# Altium PCB SENSEI_Base-Board.PcbDoc (part 9 of 10)
Units mm, origin at the board's own origin, x right, y up, seen from the top; angles counter-clockwise.
Board outline 51.6 x 28.1 mm, 8 copper layers (Top Sig/Pwr, GND1, Sig1, GND2, Sig2, Pwr, GND3, Bot Sig/Pwr), stack 1.53 mm thick; 209 components, 201 nets, 1031 pads, 2222 vias.
Unrouted connection lines stored in the file: 214.
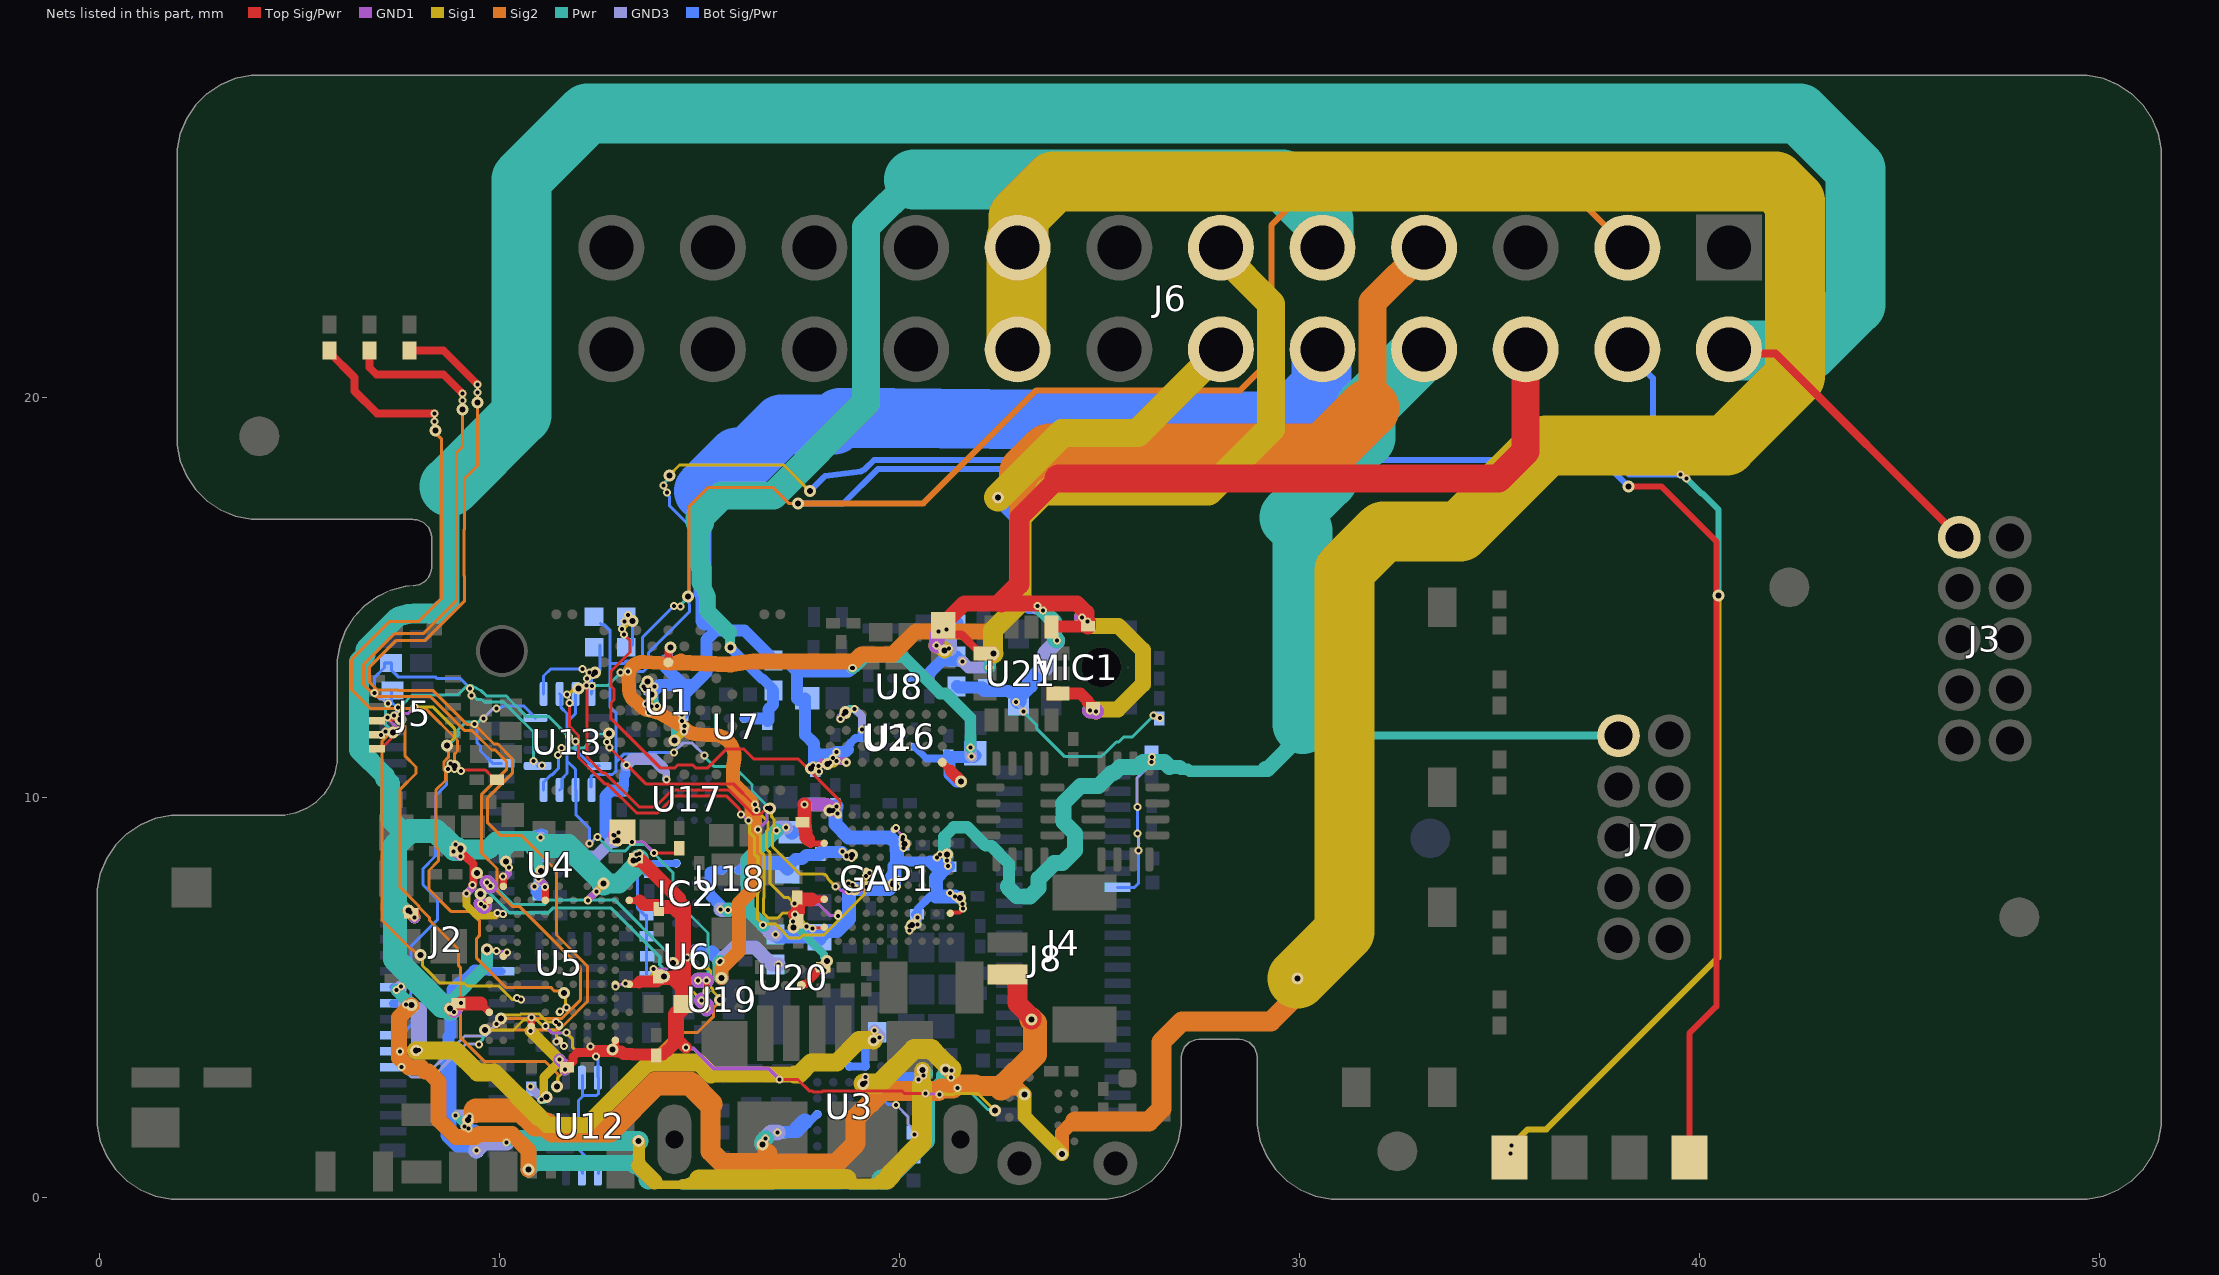
[diagram p14: the nets of this part, all layers, seen from the top]

## Via types
v1: diameter 0.2, hole 0.1, Top Sig/Pwr to GND1, 544 vias
v2: diameter 0.2, hole 0.1, GND3 to Bot Sig/Pwr, 436 vias
v3: diameter 0.2, hole 0.1, GND1 to Sig1, 385 vias
v4: diameter 0.3, hole 0.15, Sig1 to Pwr, 293 vias
v5: diameter 0.3, hole 0.15, Top Sig/Pwr to Bot Sig/Pwr, tented both sides, 284 vias
v6: diameter 0.2, hole 0.1, Pwr to GND3, 280 vias

## Nets (pads, with @x,y where several pads share a name; then routed paths per layer and width w, separated by ;. In a path a pad name is that pad's centre, name@x,y a point inside that pad or via, vN(x,y) a via of type N, cw(c..) or ccw(c..) an arc to the next point about the centre after c; other vN are vias at no path point) (continued)
SPI_B_CLK_GAP: GAP1.D6 J6.4 R14.1 R39.1 U13.8 | length 72.4
  Top Sig/Pwr w0.075: v1(11.758,12.353) 11.758,11.769 11.98,11.547 11.98,10.997 12.639,10.338 12.701,10.338 13.434,9.605 13.961,9.605 14.394,10.037 15.585,10.037 15.674,10.037 15.986,9.725 15.986,9.719 16.017,9.687 16.017,9.599 v1(16.041,9.575) ; GAP1.D6@19.175,8.15 19.217,8.15 v1(19.261,8.106)
  Top Sig/Pwr w0.15: R39.1@35.25,1 35.25,1.075 v1(35.275,1.1)
  GND1 w0.075: v3(11.697,12.567) 11.697,12.534 11.734,12.496 11.734,12.377 v1(11.758,12.353) ; v1(16.041,9.575) 16.056,9.575 16.213,9.418 v3(16.229,9.418) ; v3(19.164,8.031) 19.175,8.031 19.25,8.106 v1(19.261,8.106)
  GND1 w0.15: v1(35.275,1.1) 35.275,1.264 v3(35.308,1.297)
  GND3 w0.075: v6(12.176,12.797) 12.185,12.788 12.311,12.788 v2(12.32,12.778) ; v6(13.03,13.117) 13.046,13.132 13.205,13.132 v2(13.22,13.147) ; v6(14.1,17.8) 14.124,17.776 14.124,17.718 14.188,17.654 v2(14.188,17.62)
  GND3 w0.15: v2(39.525,18.075) 39.539,18.075 39.629,17.985 39.665,17.985 v6(39.675,17.975)
  Sig1 w0.075: v3(11.697,12.567) 11.725,12.567 11.834,12.676 11.941,12.676 v4(11.984,12.719) ; v4(14.25,18.05) 14.507,18.307 17.109,18.307 v5(17.764,17.651) ; v3(16.229,9.418) 16.253,9.394 16.253,9.172 16.261,9.164 16.261,9.108 16.382,8.987 16.382,8.579 16.472,8.489 16.472,7.601 16.46,7.589 16.46,6.942 16.573,6.829 16.914,6.829 17.124,6.619 17.124,6.605 17.245,6.484 17.512,6.484 17.587,6.56 18.113,6.56 19.129,7.575 19.146,7.615 v3(19.164,8.031)
  Sig1 w0.15: v3(35.308,1.297) 35.711,1.7 36.175,1.7 40.475,6 v4(40.475,15.05)
  Pwr w0.075: v4(11.984,12.719) 12.045,12.719 12.099,12.773 12.152,12.773 v6(12.176,12.797) 12.71,12.797 v6(13.03,13.117) ; v6(14.1,17.8) 14.1,17.834 14.207,17.941 14.207,18.007 v4(14.25,18.05)
  Pwr w0.15: v6(39.675,17.975) 40.054,17.596 40.077,17.596 40.475,17.199 v4(40.475,15.05)
  Bot Sig/Pwr w0.075: U13.8@12.305,12.584 U13.8@12.305,12.655 ; v2(12.32,12.778) 12.32,12.765 U13.8@12.305,12.75 ; U13.8@12.324,12.655 12.324,12.731 U13.8@12.305,12.75 ; R14.1@12.524,13.81 12.524,13.183 12.305,12.964 U13.8@12.305,12.75 ; v2(13.22,13.147) 13.605,13.147 13.729,13.271 13.729,13.613 14.728,14.612 14.75,14.634 14.75,14.696 14.744,14.949 14.744,14.971 14.737,14.977 14.737,16.805 14.25,17.293 14.25,17.524 14.188,17.586 v2(14.188,17.62) v2@14.188,17.627
  Bot Sig/Pwr w0.15: v5(17.764,17.651) 18.098,17.985 18.142,18.029 19.043,18.148 19.14,18.202 19.369,18.431 37.888,18.431 38.243,18.075 38.841,18.075 ; J6.4@38.2,21.2 38.2,21.121 38.841,20.48 38.841,18.075 ; v2(39.525,18.075) 38.841,18.075
SPI_B_CS: J2.24 J5.7 U5.F3 U13.4 | length 17
  Top Sig/Pwr w0.075: J5.7@6.818,11.936 7.368,11.936 7.499,12.067 v1(7.533,12.067) ; U5.F3@11.5,4.625 11.504,4.629 11.504,4.632 v1(11.516,4.643)
  GND1 w0.075: v1(7.533,12.067) 7.557,12.091 7.716,12.091 v3(7.886,12.261) ; v1(11.516,4.643) 11.542,4.643 11.649,4.75 v3(11.675,4.75)
  Sig2 w0.075: v4(8.692,11.297) 8.725,11.264 8.725,11 8.622,10.897 8.622,10.679 8.656,10.645 8.656,10.422 8.42,10.186 8.42,8.756 8.476,8.7 8.476,8.407 8.24,8.171 8.24,7.703 8.801,7.142 9.277,7.142 9.502,6.917 9.502,6.537 9.434,6.469 9.434,5.977 10.163,5.249 11.286,5.249 11.383,5.153 11.578,5.153 v4(11.622,5.11)
  GND3 w0.075: v2(9.375,11.832) 9.399,11.856 9.452,11.856 9.564,11.967 v6@9.603,11.967 ; v6(9.603,11.973) 9.831,12.201 9.902,12.201 v2(9.926,12.225)
  Sig1 w0.075: v3(7.886,12.261) 8.339,12.261 8.875,11.725 8.875,11.715 8.89,11.7 8.89,11.506 8.692,11.308 v4(8.692,11.297) ; v4(11.622,5.11) 11.622,5.06 11.651,5.03 11.651,4.774 v3(11.675,4.75)
  Pwr w0.075: v4(8.692,11.297) 8.722,11.297 8.964,11.539 8.964,11.681 9.159,11.876 9.472,11.876 9.569,11.973 v6(9.603,11.973)
  Bot Sig/Pwr w0.075: v2(9.375,11.832) 9.375,11.798 9.437,11.736 9.437,11.373 9.529,11.282 9.529,11.156 9.835,10.85 J2.24@10.055,10.85 ; v2(9.926,12.225) 9.949,12.249 10.061,12.249 10.099,12.288 10.603,12.288 U13.4@10.902,11.988
SPI_B_CS_GAP: GAP1.A2 U13.5 | length 14.4
  Top Sig/Pwr w0.075: v1(12.19,12.972) 12.19,10.998 12.575,10.613 12.637,10.613 13.496,9.755 13.899,9.755 14.332,10.187 15.647,10.187 15.736,10.187 16.136,9.787 16.136,9.781 16.337,9.58 16.539,9.58 v1(16.696,9.737) ; v1(17.831,6.725) 17.844,6.738 18.113,6.738 GAP1.A2@18.125,6.75
  GND1 w0.075: v1(12.19,12.972) 12.214,12.996 12.214,13.056 12.25,13.092 v3(12.25,13.126) ; v3(16.473,9.196) 16.696,9.42 v1(16.696,9.737) ; v3(17.682,6.772) 17.706,6.749 17.808,6.749 v1(17.831,6.725)
  GND3 w0.075: v2(12.082,13.208) 12.116,13.208 12.248,13.076 12.325,13.076 v6(12.349,13.052)
  Sig1 w0.075: v3(12.25,13.126) v4(12.391,13.126) ; v3(16.473,9.196) 16.497,9.172 16.497,9.084 16.532,9.049 16.532,8.641 16.622,8.551 16.622,7.491 16.61,7.479 16.61,7.092 16.723,6.979 16.959,6.979 17.093,7.113 17.421,7.113 17.537,6.996 17.537,6.966 17.55,6.954 17.55,6.939 17.682,6.806 v3(17.682,6.772)
  Pwr w0.075: v6(12.349,13.052) 12.391,13.095 v4(12.391,13.126)
  Bot Sig/Pwr w0.075: U13.5@11.105,12.584 11.105,13.03 11.283,13.208 v2(12.082,13.208)
SPI_B_MISO: J5.11 R48.2 U5.E2 U13.12 | length 23.3
  Top Sig/Pwr w0.075: J5.11@6.818,11.236 7.07,11.236 7.289,11.455 7.289,11.503 7.457,11.671 v1(7.475,11.671) ; v1(11.152,4.276) v1(11.152,4.276)
  GND1 w0.075: v3(7.205,11.998) 7.205,11.97 7.475,11.7 v1(7.475,11.671) ; v1(11.152,4.276) 11.326,4.102 11.663,4.102 v3(11.675,4.114)
  Sig2 w0.075: v4(7.525,11.95) 7.525,11.889 7.647,11.767 7.647,11.201 7.648,11.2 7.648,11.027 7.917,10.758 7.917,10.597 7.523,10.203 7.523,7.748 7.988,7.284 7.988,7.256 8.254,6.99 8.254,6.926 8.984,6.195 8.984,5.791 9.026,5.749 9.026,3.998 9.624,3.4 11.145,3.4 11.473,3.072 11.473,2.8 v4(11.445,2.772)
  GND3 w0.075: v6(7.364,12.05) 7.364,12.084 7.444,12.164 7.444,12.221 v2(7.468,12.245) ; v6(11.739,11.517) 11.762,11.517 11.884,11.394 v2(11.907,11.394)
  Sig1 w0.075: v3(7.205,11.998) 7.228,11.974 7.501,11.974 v4(7.525,11.95) ; v4(11.445,2.772) 11.453,2.78 11.453,2.985 11.901,3.432 11.901,3.684 11.826,3.759 11.826,3.963 v3(11.675,4.114)
  Pwr w0.075: v6(7.364,12.05) 7.395,12.05 7.495,11.95 v4(7.525,11.95) 7.577,12.002 7.577,12.316 7.817,12.557 8.964,12.557 9.207,12.8 9.31,12.8 ccw(c10.048,13.825) 9.548,12.665 9.678,12.536 10.165,12.536 10.294,12.407 10.685,12.015 11.24,12.015 v6(11.739,11.517)
  Bot Sig/Pwr w0.075: R48.2@7.308,12.674 7.308,12.379 7.441,12.245 v2(7.468,12.245) ; v2(11.907,11.394) 11.893,11.38 11.893,11.201 12.31,10.784 U13.12@12.51,10.784
SPI_B_MISO_GAP: GAP1.D5 J6.3 R15.1 R41.1 U13.13 | length 88
  Top Sig/Pwr w0.15: v5(38.225,17.775) 39.05,17.775 40.425,16.4 40.425,4.775 39.75,4.1 R41.1@39.75,1
  GND1 w0.075: v3(18.4,7.774) 18.434,7.774 18.534,7.673 18.574,7.673 18.652,7.595 18.94,7.595 v1(19.179,7.756)
  Sig2 w0.075: v4(14.717,15.025) 14.738,15.046 14.738,17.263 15.225,17.75 16.835,17.75 17.235,17.35 v5(17.463,17.35)
  Sig2 w0.15: v5(17.463,17.35) 20.6,17.35 23.425,20.175 28.525,20.175 29.3,20.95 29.3,24.3 30.05,25.05 36.89,25.05 J6.3@38.2,23.74
  GND3 w0.075: v2(14.363,14.784) 14.367,14.78 14.52,14.78 v6(14.525,14.775) ; v2(14.37,11.117) 14.37,11.137 14.586,11.352 14.824,11.352 v6(15.134,11.042)
  Sig1 w0.075: v4(16.766,9.714) 16.809,9.671 16.809,9.512 16.863,9.459 16.863,9.125 16.832,9.094 16.832,8.765 17.52,8.077 18.108,8.077 cw(c18.108,8.002) 18.171,8.043 18.226,7.958 ccw(c18.446,8.101) 18.259,7.917 v3(18.4,7.774)
  Pwr w0.075: v6(14.525,14.775) 14.525,14.804 14.717,14.996 v4(14.717,15.025) ; v6(15.134,11.042) 15.134,11.008 15.222,10.92 ; 15.222,10.919 15.376,10.766 15.565,10.766 15.568,10.769 15.863,10.769 16.315,10.317 16.315,10.166 v4(16.766,9.714)
  Bot Sig/Pwr w0.075: U13.13@12.298,10.256 12.298,10.525 12.346,10.572 12.827,10.572 12.923,10.667 12.923,10.884 ; R15.1@12.532,14.347 12.564,14.315 12.623,14.315 12.773,14.165 12.773,13.343 ; v2(14.363,14.784) 13.579,14.001 13.579,13.523 13.458,13.402 13.175,13.402 13.116,13.343 12.773,13.343 ; v2@14.367,11.128 14.357,11.117 13.746,11.117 13.716,11.087 13.126,11.087 12.923,10.884 ; 12.773,13.343 12.773,12.252 12.923,12.102 12.923,10.884
  Bot Sig/Pwr w0.15: v5(17.463,17.35) 18.606,17.35 19.462,18.206 37.794,18.206 v5(38.225,17.775)
SPI_B_MOSI: J5.9 R47.1 U5.C4 U13.1 | length 17.6
  Top Sig/Pwr w0.075: v1(10.441,4.979) 10.446,4.975 U5.C4@10.45,4.975
  GND1 w0.075: v1(7.044,11.555) 7.05,11.555 7.145,11.65 v3(7.151,11.65) ; v1(10.441,4.979) 10.51,4.979 v3(10.543,4.946)
  Sig2 w0.075: v4(7.338,11.625) 7.289,11.625 7.14,11.476 7.136,11.476 7.065,11.404 7.065,6.925 7.804,6.186 7.844,6.186 7.975,6.054 v4(8.036,6.054)
  GND3 w0.075: v2(6.875,12.606) 6.875,12.6 7.022,12.453 7.078,12.453 7.18,12.35 v6(7.214,12.35) ; v2(9.273,12.722) 9.291,12.704 9.291,12.566 v6(9.309,12.548) ; v6(10.854,10.907) 10.878,10.883 10.944,10.883 11.033,10.794 v2(11.067,10.794)
  Sig1 w0.075: v3(7.151,11.65) 7.164,11.638 7.325,11.638 v4(7.338,11.625) ; v4(8.036,6.054) 8.079,6.011 8.079,5.792 8.234,5.638 ; 8.235,5.638 8.52,5.352 9.028,5.352 9.034,5.346 9.127,5.346 9.194,5.28 9.989,5.28 10.322,4.946 v3(10.543,4.946)
  Pwr w0.075: v6(7.214,12.35) 7.214,12.317 7.152,12.254 7.152,11.823 7.338,11.637 v4(7.338,11.625) ; v6(9.309,12.548) 9.343,12.548 9.448,12.443 9.558,12.443 9.615,12.386 10.103,12.386 10.324,12.164 10.854,11.635 v6(10.854,10.907)
  Bot Sig/Pwr w0.075: v2(6.875,12.606) 6.875,12.991 7.128,13.244 7.128,13.359 R47.1@7.293,13.359 ; R47.1@7.308,13.359 7.308,13.175 7.471,13.011 8.397,13.011 8.44,12.968 9.027,12.968 v2(9.273,12.722) ; U13.1@10.96,10.784 11.058,10.784 v2(11.067,10.794)
SPI_B_MOSI_GAP: GAP1.B3 U13.16 | length 11.4
  Top Sig/Pwr w0.075: v1(12.754,11.246) 13.663,10.337 15.709,10.337 15.851,10.337 16.367,9.822 v1(16.396,9.822)
  GND1 w0.075: v3(12.69,11.388) 12.714,11.364 12.714,11.32 12.754,11.28 v1(12.754,11.246) ; v1(16.396,9.822) 16.411,9.806 16.411,9.702 v3(16.426,9.687) ; v3(17.376,7.346) 17.393,7.329 17.53,7.329 17.541,7.318 17.99,7.318 18.258,7.05 18.456,7.05 v1(18.471,7.036)
  GND3 w0.075: v2(11.468,11.063) 11.492,11.087 11.492,11.138 11.558,11.204 v6(11.558,11.238)
  Sig1 w0.075: v3(12.69,11.388) 12.714,11.412 12.714,11.541 v4@12.771,11.598 ; v3(16.426,9.687) 16.426,9.683 16.713,9.397 16.713,9.187 16.682,9.156 16.682,8.703 16.772,8.613 16.772,7.845 17.122,7.495 17.225,7.495 17.374,7.346 v3(17.376,7.346)
  Pwr w0.075: v6(11.558,11.238) 12.126,11.238 12.465,11.577 12.719,11.577 v4(12.74,11.598)
  Bot Sig/Pwr w0.075: U13.16@11.11,10.184 11.11,10.384 11.279,10.553 11.309,10.553 11.476,10.721 v2@11.476,11.064
SPI_GAP_SEL: U5.K5 U12.6 U12.7 U12.14 U12.15 U13.6 U13.7 U13.14 U13.15 | length 24.9
  Top Sig/Pwr w0.075: v1(12.9,5.275) U5.K5@12.9,5.325
  GND1 w0.075: v1(12.9,5.275) 12.924,5.299 12.987,5.299 13.01,5.322 13.127,5.322 v3(13.151,5.346) ; v3(13.852,5.707) 14.187,5.707 14.469,5.989 v3(14.688,5.989)
  Sig2 w0.075: v4@12.8,3.7 v4(12.825,3.7) 13.016,3.509 13.692,3.509 13.796,3.509 14.409,4.123 14.956,4.123 15.358,4.525 15.358,4.745 15.52,4.906 v4(15.52,4.93)
  GND3 w0.075: v2(12.25,8.849) 12.274,8.849 12.43,9.006 v6(12.454,9.006) ; v6(12.275,3.772) 12.299,3.748 12.299,3.676 12.421,3.555 v2(12.421,3.521)
  Sig1 w0.075: v3(13.151,5.346) 13.169,5.328 13.584,5.328 13.832,5.576 13.832,5.687 v3(13.852,5.707) ; v3(14.688,5.989) 14.962,5.715 15.233,5.715 15.277,5.671 15.277,5.262 15.34,5.199 15.34,5.146 15.52,4.967 v4(15.52,4.93)
  Pwr w0.075: v6(12.275,3.772) 12.693,3.772 12.764,3.7 v4(12.825,3.7) ; v6(12.454,9.006) 12.806,8.653 13.14,8.653 13.306,8.819 13.64,8.819 14.343,8.116 14.343,7.478 15.216,6.606 15.216,5.324 15.34,5.199 15.34,5.146 15.52,4.967 v4(15.52,4.93)
  Bot Sig/Pwr w0.075: U13.15@11.51,10.184 11.565,10.239 11.565,10.462 11.695,10.592 11.695,10.908 ; U13.6@11.51,12.584 11.547,12.547 11.547,12.242 11.695,12.094 11.695,11.879 ; U13.14@11.905,10.184 11.905,10.698 11.695,10.908 ; U13.7@11.905,12.584 11.905,12.089 11.695,11.879 ; U13.14@11.91,10.184 11.912,10.182 11.912,9.572 12.25,9.234 v2(12.25,8.849) ; U12.15@12.005,0.717 U12.15@12.075,0.647 ; U12.15@12.075,0.6 12.075,1.105 ; 12.08,2.519 U12.6@12.08,3.045 ; 12.282,2.544 12.431,2.544 12.475,2.587 U12.7@12.475,3 ; 12.281,2.544 12.105,2.544 11.981,2.42 11.981,1.199 12.075,1.105 ; v2(12.421,3.521) 12.421,3.487 12.467,3.441 U12.7@12.467,2.989 ; U12.14@12.475,0.6 12.475,0.774 12.405,0.844 12.332,0.844 12.2,0.976 12.2,0.979 12.075,1.105 ; 11.695,10.908 11.695,11.879
SWDCLK: J2.45 R49.2 U5.F2 | length 30.6
  Top Sig/Pwr w0.075: v1(11.492,4.319) 11.492,4.283 U5.F2@11.5,4.275
  Top Sig/Pwr w0.2: R49.2@6.75,21.175 6.75,20.75 6.925,20.575 8.6,20.575 v1(9.075,20.1)
  GND1 w0.075: v3(9.075,19.925) v1(9.075,20.1) ; v3(11.415,4.387) 11.425,4.387 v1(11.492,4.319)
  Sig2 w0.075: v4(9.075,19.7) 9.075,18.755 8.925,18.605 8.925,14.912 8.113,14.1 7.388,14.1 6.6,13.312 6.6,12.824 6.899,12.525 8.274,12.525 9.124,11.675 9.313,11.675 9.807,11.181 9.897,11.181 10.174,10.903 10.174,10.686 9.55,10.062 9.55,8.612 9.94,8.222 9.94,7.66 10.325,7.275 10.497,7.275 12.034,5.738 12.034,4.939 11.564,4.469 v4(10.037,4.469)
  GND3 w0.075: v2(7.515,3.648) 7.515,3.614 7.973,3.156 8.274,3.156 8.691,3.573 8.691,3.584 9.145,4.037 9.641,4.037 9.663,4.037 9.787,4.162 9.787,4.184 v6(9.932,4.328)
  Sig1 w0.075: v4(9.075,19.7) v3(9.075,19.925) ; v4(10.037,4.469) 10.126,4.558 10.519,4.558 10.545,4.584 10.997,4.584 11.194,4.387 v3(11.415,4.387)
  Pwr w0.075: v6(9.932,4.328) 9.932,4.346 10.037,4.451 v4(10.037,4.469)
SWDIO: J2.46 R4.2 U5.F1 | length 31.5
  Top Sig/Pwr w0.075: v1(11.425,3.889) 11.464,3.889 U5.F1@11.5,3.925
  Top Sig/Pwr w0.2: R4.2@7.75,21.175 8.6,21.175 v1(9.45,20.325)
  GND1 w0.075: v3(9.45,20.125) v1(9.45,20.325) ; v1@11.425,3.875 11.435,3.865 11.503,3.865 11.58,3.789 v3(11.614,3.789)
  Sig2 w0.075: v4(9.454,19.871) 9.454,18.288 9.125,17.959 9.125,16.698 9.12,16.693 9.12,15.532 9.125,15.527 9.125,14.9 8.15,13.925 7.425,13.925 6.75,13.25 6.75,12.886 6.958,12.679 7.471,12.679 7.475,12.675 8.336,12.675 9.186,11.825 9.375,11.825 9.869,11.331 9.959,11.331 10.324,10.966 10.324,10.599 9.7,9.975 9.7,9.375 10.025,9.05 10.55,9.05 11.427,8.173 11.427,6.557 12.2,5.784 12.2,4.893 11.492,4.185 v4(9.64,4.185)
  GND3 w0.075: v2(7.555,3.254) 7.802,3.006 8.336,3.006 8.962,3.632 8.962,3.634 9.155,3.827 9.487,3.827 v6(9.489,3.825)
  Sig1 w0.075: v3(9.45,20.125) 9.452,20.123 9.452,19.873 v4(9.454,19.871) ; v4(9.64,4.185) 10.358,4.185 10.607,4.434 10.935,4.434 11.185,4.183 11.333,4.183 11.428,4.089 11.428,3.974 v3(11.614,3.789)
  Pwr w0.075: v6(9.489,3.825) 9.489,3.859 9.597,3.967 9.597,4.142 v4(9.64,4.185)
  Bot Sig/Pwr w0.075: v2(7.555,3.254) J2.46@7.555,3.26
SWO: J2.44 R30.1 R50.2 | length 25.3
  Top Sig/Pwr w0.075: v1(9.043,10.656) 9.065,10.677 9.658,10.677 9.724,10.612 9.724,10.607 9.898,10.434 R30.1@9.943,10.434
  Top Sig/Pwr w0.2: R50.2@5.75,21.175 5.75,21.125 6.383,20.492 6.383,20.158 6.94,19.6 v1(8.375,19.6)
  GND1 w0.075: v3(8.375,19.4) v1(8.375,19.6) ; v3(8.882,10.711) 8.916,10.711 8.947,10.68 9.019,10.68 v1(9.043,10.656)
  Sig2 w0.075: v4(8.4,19.175) 8.4,19.114 8.55,18.964 8.55,14.961 7.989,14.4 7.264,14.4 6.3,13.436 6.3,12.7 6.775,12.225 8.15,12.225 8.954,11.421 8.954,11.158 8.886,11.089 v4(8.886,10.78)
  GND3 w0.075: v2@8.752,10.797 v2@8.751,10.795 ; v2(8.775,10.85) 8.751,10.826 v2@8.751,10.795 ; v6@8.728,10.757 8.751,10.781 v2@8.751,10.795 ; v6@8.728,10.757 8.714,10.743 v6(8.714,10.709) 8.728,10.724 v6@8.728,10.757 ; v6@8.728,10.757 8.728,10.772 v2@8.751,10.795
  Sig1 w0.075: v3(8.375,19.4) 8.388,19.387 8.388,19.188 v4(8.4,19.175) ; v3(8.882,10.711) 8.882,10.777 v4(8.886,10.78)
  Pwr w0.075: v6(8.714,10.709) 8.738,10.733 8.778,10.733 8.825,10.78 v4(8.886,10.78)
  Bot Sig/Pwr w0.075: J2.44@7.345,4.05 7.565,4.05 7.675,4.16 7.675,4.18 7.812,4.318 7.812,4.625 7.893,4.706 7.893,4.896 7.795,4.994 7.795,5.03 7.78,5.046 7.78,5.085 7.788,5.093 7.788,5.346 7.795,5.354 7.795,6.276 8.45,6.931 8.45,7.456 8.09,7.816 8.09,8.216 8.407,8.534 8.407,8.986 8.407,10.041 8.676,10.31 8.676,10.717 8.775,10.816 v2(8.775,10.85)
USB_N: U5.A11 U19.C2 | length 7.9
  Top Sig/Pwr w0.156: v1(9.632,7.275) 9.64,7.283 9.64,7.306 9.75,7.416 U5.A11@9.75,7.425 ; U19.C2@15.175,4.75 15.175,4.719 v1(15.181,4.714)
  GND1 w0.381: v3(9.541,7.336) 9.603,7.275 v1(9.632,7.275) ; v3(15.058,4.924) 15.181,4.801 v1(15.181,4.714)
  Sig1 w0.079: v4(9.528,7.586) 9.535,7.58 9.535,7.343 v3(9.541,7.336) ; v4(14.122,5.525) 14.181,5.525 14.265,5.441 14.308,5.441 14.628,5.121 14.861,5.121 v3(15.058,4.924)
  Pwr w0.079: v4(9.528,7.586) 9.565,7.624 9.738,7.624 10.247,7.115 11.223,7.115 11.338,7.23 12.8,7.23 14.011,6.018 14.011,5.815 14.08,5.747 14.08,5.567 v4(14.122,5.525)
USB_P: U5.A12 U19.C1 | length 7.9
  Top Sig/Pwr w0.156: U5.A12@9.75,7.775 9.762,7.787 v1(9.774,7.787) ; U19.C1@15.175,5.15 15.178,5.153 15.178,5.414 v1(15.181,5.417)
  GND1 w0.381: v3(9.698,7.867) 9.774,7.79 v1(9.774,7.787) ; v3(14.971,5.425) 15.173,5.425 v1(15.181,5.417)
  Sig1 w0.079: v4(9.438,8.111) 9.446,8.111 9.689,7.868 v3@9.689,7.865 ; v4(14.341,5.86) 14.38,5.821 14.38,5.707 14.682,5.405 14.951,5.405 v3(14.971,5.425)
  Pwr w0.079: v4(9.438,8.111) 9.629,7.919 9.734,7.919 10.332,7.321 11.137,7.321 11.252,7.436 12.885,7.436 14.218,6.104 14.218,6.017 14.341,5.894 v4(14.341,5.86)
V0p65_CSI2: C88.1 C89.1 C96.1 GAP1.A4 U20.A1 | length 4
  Top Sig/Pwr w0.18: 17.809,7.45 GAP1.A4@18.125,7.45
  Top Sig/Pwr w0.2: U20.A1@17.55,5.3 17.557,5.3 17.591,5.334 17.662,5.334 17.923,5.595 17.923,5.669 18.004,5.75 18.05,5.75 v1(18.125,5.675)
  Top Sig/Pwr w0.3: C88.1@17.475,7.5 17.475,7.481 C88.1@17.506,7.45
  Top Sig/Pwr w0.35: v1(17.397,7.072) 17.469,7.144 17.469,7.487 C88.1@17.475,7.493 ; C88.1@17.506,7.45 17.809,7.45
  GND1 w0.2: v3(17.337,6.895) 17.397,6.955 v1(17.397,7.072) ; v3(17.975,5.75) 18.05,5.675 v1(18.125,5.675)
  Sig1 w0.2: v3(17.337,6.895) 17.337,6.763 v4(17.353,6.747) ; v3(17.975,5.75) 18.015,5.75 18.167,5.902 v4(18.195,5.902)
  Pwr w0.2: v4(17.353,6.747) 17.373,6.728 17.462,6.728 18.114,6.076 18.114,6.01 18.195,5.929 v4(18.195,5.902)
V1p8_CSI2_SW: C85.1 C86.1 C87.1 GAP1.C7 U18.A1 | length 3.8
  Top Sig/Pwr w0.18: v1(18.806,8.488) 18.813,8.488 GAP1.C7@18.825,8.5
  GND1 w0.18: v3(18.684,8.514) 18.69,8.514 18.712,8.492 18.803,8.492 v1(18.806,8.488)
  GND3 w0.18: v2(18.575,8.65) v6(18.675,8.55)
  Sig1 w0.18: v3(18.684,8.514) 18.69,8.514 18.705,8.53 18.798,8.53 v4(18.821,8.553)
  Pwr w0.18: v4@18.784,8.517 v4(18.821,8.553) ; v4@18.818,8.55 v6(18.675,8.55) v4@18.818,8.55 ; v4@18.818,8.55 v4(18.821,8.553) ; v4@18.818,8.55 v4(18.821,8.553)
  Bot Sig/Pwr w0.2: U18.A1@15.975,8.175 15.982,8.175 16.182,8.375 16.275,8.375
  Bot Sig/Pwr w0.3: C87.1@17.2,8.226 17.2,8.25 17.403,8.453 17.573,8.453 17.676,8.557 17.994,8.557 18.025,8.588 18.025,8.634 v2@18.566,8.634
  Bot Sig/Pwr w0.35: 16.275,8.375 16.544,8.375 C85.1@16.55,8.381 ; C85.1@16.55,8.409 C85.1@16.55,8.381 ; C87.1@17.2,8.226 17.069,8.357 16.556,8.357 16.55,8.363 C85.1@16.55,8.381
V_GAP9: C25.1 C26.1 C27.1 C28.1 C29.1 C30.1 C31.1 C32.1 C55.1 C56.1 C84.1 GAP1.A8 GAP1.B10 GAP1.C5 GAP1.F5 GAP1.F9 GAP1.G2 GAP1.J7 GAP1.K3 J4.13 J6.8 J7.1 R5.2 R14.2 R15.2 R22.2 U18.A2 | length 71.7
  Top Sig/Pwr w0.075: v1(13.112,14.076) 13.263,13.925 13.263,13.621 12.788,13.146 12.788,12.785 12.863,12.71 12.863,12.431 12.788,12.356 12.788,11.975 14.025,10.737 14.392,10.737 14.467,10.813 14.833,10.813 14.908,10.737 15.214,10.737 15.689,11.212 16.105,11.212 16.361,10.957 16.74,10.957 16.743,10.96 17.467,10.96 18.512,9.915 18.512,9.777 18.489,9.755 18.489,9.594 GAP1.B10@18.47,9.575 ; GAP1.F9@19.875,9.2 19.887,9.2 v1(19.915,9.229) ; GAP1.G2@20.225,6.75 v1(20.253,6.776) v1(20.253,6.776)
  Top Sig/Pwr w0.1: GAP1.C5@18.825,7.8 18.825,7.804 v1(18.829,7.808) ; GAP1.J7@20.925,8.5 20.936,8.5 v1(20.944,8.493) ; GAP1.K3@21.275,7.1 21.291,7.116 21.507,7.116 21.594,7.203 v1(21.594,7.219)
  Top Sig/Pwr w0.15: 17.775,8.831 17.797,8.831 17.809,8.843 18.118,8.843 GAP1.A8@18.125,8.85 ; v1(18.45,9.6) 18.45,9.575 GAP1.B10@18.475,9.55
  Top Sig/Pwr w0.18: v1(19.851,7.829) 19.851,7.824 GAP1.F5@19.875,7.8
  Top Sig/Pwr w0.2: 17.713,8.953 17.713,8.894 17.775,8.831
  Top Sig/Pwr w0.35: C56.1@17.629,9.375 v1(17.629,9.82) ; C56.1@17.631,9.358 17.675,8.991 17.713,8.953
  GND1 w0.075: v3(13.072,14.201) 13.092,14.181 13.092,14.096 v1(13.112,14.076) ; v1(19.915,9.229) 19.915,9.207 20.088,9.035 v3(20.088,9.013) ; v3(20.251,6.674) v1(20.253,6.776) v1(20.253,6.776)
  GND1 w0.1: v3@18.734,7.823 v3(18.731,7.84) v1(18.829,7.808) ; v1(20.944,8.493) 20.944,8.495 21.018,8.57 v3(21.018,8.572) ; v3(21.586,7.335) 21.59,7.331 21.59,7.223 v1(21.594,7.219)
  GND1 w0.15: v3(18.359,9.682) 18.363,9.682 18.446,9.6 v1(18.45,9.6)
  GND1 w0.18: v1(19.851,7.829) 19.855,7.825 19.88,7.825 19.941,7.764 v3(19.946,7.764)
  GND1 w0.35: v1(17.629,9.82) 18.046,9.825 cw(c18.05,9.5) 18.094,9.822 18.122,9.818 cw(c18.075,9.471) 18.322,9.719 v3(18.359,9.682)
  GND3 w0.075: v6(13.132,14.391) 13.156,14.414 13.156,14.465 13.218,14.527 v2(13.218,14.561) ; v6(20.075,8.95) 20.091,8.934 20.091,8.752 v2(20.107,8.736) ; v2(25.96,9.099) 25.975,9.084 25.975,8.833 ; v2(25.96,9.752) 25.937,9.775 25.937,10.475 26.149,10.686 26.149,10.736 v6(26.301,10.888) ; v2(25.975,8.674) 25.975,8.833 ; 25.989,8.846 25.975,8.833 ; v6@26.31,10.888 26.31,11 v2(26.32,11.009)
  GND3 w0.1: v2(18.746,7.651) 18.773,7.651 18.814,7.693 18.876,7.693 v6(18.896,7.712) ; v6(21.197,8.425) 21.208,8.415 21.208,8.291 v2(21.219,8.281) ; v2(21.269,7.611) 21.289,7.611 21.375,7.525 v6(21.396,7.525)
  GND3 w0.15: v6(18.336,9.663) 18.336,9.67 v6@18.349,9.683 ; v6@18.359,9.673 v6@18.349,9.683 ; v2(18.429,9.771) 18.429,9.764 v6@18.349,9.683
  GND3 w0.18: v2(19.825,7.875) 19.829,7.879 19.893,7.879 19.954,7.94 v6(19.959,7.94)
  GND3 w0.2: v6(20.45,6.825) v2(20.45,7)
  GND3 w0.35: v2(15.532,7.197) 15.549,7.181 v6(15.719,7.181) ; v6(16.593,6.807) 16.836,6.564 v2(16.9,6.564) ; v6(16.927,9.169) 17.003,9.245 v2(17.173,9.245)
  Sig1 w0.075: v3(13.072,14.201) 13.1,14.201 13.303,14.404 v4(13.332,14.404) ; v3(20.088,9.013) 20.109,8.991 20.109,8.857 v4(20.13,8.836) ; v3(20.251,6.674) 20.251,6.753 v4(20.312,6.813)
  Sig1 w0.1: v3(18.731,7.84) v4(18.884,7.701) ; v3(21.018,8.572) 21.022,8.568 21.195,8.568 v4(21.199,8.565) ; v4(21.524,7.487) 21.524,7.433 21.567,7.39 21.567,7.354 v3(21.586,7.335)
  Sig1 w0.15: v4(18.251,9.676) 18.254,9.679 18.356,9.679 v3(18.359,9.682)
  Sig1 w0.18: v4(19.839,7.822) 19.871,7.822 19.925,7.768 19.942,7.768 v3(19.946,7.764)
  Pwr w0.075: v6(13.132,14.391) 13.139,14.397 13.325,14.397 v4(13.332,14.404) ; v6(20.075,8.95) 20.075,8.891 v4(20.13,8.836)
  Pwr w0.1: v6(18.896,7.712) v4(18.884,7.701) v6(18.896,7.712) ; v4@21.198,8.426 v4@21.198,8.564 ; v6(21.396,7.525) 21.486,7.525 v4(21.524,7.487)
  Pwr w0.15: v4(18.251,9.676) 18.323,9.676 v6(18.336,9.663)
  Pwr w0.18: v4@19.84,7.822 v6@19.958,7.94
  Pwr w0.2: v4(20.312,6.813) 20.323,6.825 v6(20.45,6.825) ; 30.125,11.75 30.335,11.54 J7.1@37.98,11.54
  Pwr w0.29: 27.049,10.733 27.08,10.701 27.211,10.701 27.258,10.655 29.105,10.655 29.155,10.705
  Pwr w0.31: v4(21.199,8.565) 21.124,8.639 21.124,9.013 21.361,9.251 21.702,9.251 22.158,8.795 22.288,8.795 22.744,8.339 22.744,7.81 22.716,7.782
  Pwr w0.35: v6(15.719,7.181) 15.719,7.194 15.725,7.2 16.2,7.2 ; v6(16.593,6.807) 16.2,7.2 ; v6(16.927,9.169) 16.2,8.442 16.2,7.2 ; 26.75,10.763 26.865,10.763 26.999,10.763 ccw(c27.207,11.045) 27.049,10.733
  Pwr w0.4: 22.716,7.782 22.716,7.756 22.954,7.518 23.265,7.518 23.484,7.738 23.484,7.966 23.873,8.355 24.075,8.355 24.39,8.669 24.39,9.098 24.103,9.385 24.103,9.856 24.534,10.287 24.983,10.287 25.3,10.604 25.361,10.604 25.521,10.763 25.965,10.763 26.09,10.888 v6(26.301,10.888) 26.626,10.888 26.75,10.763 ; 29.155,10.705 29.205,10.705 30.075,11.575 30.075,11.833
  Pwr w1.5: 30.075,11.833 30.075,16.675 29.75,17 30.7,17.95 30.7,18.05 31.65,19 31.65,19.73 J6.8@33.12,21.2
  Bot Sig/Pwr w0.075: R14.2@13.307,13.786 13.336,13.815 R15.2@13.336,14.514 ; J4.13@25.455,7.75 25.881,7.75 25.975,7.844 v2(25.975,8.674) ; v2@25.96,9.099 v2(25.96,9.752)
  Bot Sig/Pwr w0.2: 15.275,8.125 15.325,8.175 U18.A2@15.575,8.175 ; C27.1@20.396,7.075 C27.1@20.45,7.021 ; v2(20.45,7) C27.1@20.45,7.021 ; 20.914,7.519 20.769,7.519 20.45,7.2 C27.1@20.45,7.021
  Bot Sig/Pwr w0.25: 15.263,7.941 15.263,7.906 15.262,7.905 15.262,7.563 15.3,7.525 ; 19.934,8.506 19.942,8.497 20.048,8.392 20.733,8.392 20.735,8.39 20.77,8.39
  Bot Sig/Pwr w0.3: 15.263,7.941 15.275,7.953 15.275,8.125 ; 15.3,7.525 15.532,7.293 v2(15.532,7.197) ; 20.77,8.39 20.806,8.39 20.831,8.365
  Bot Sig/Pwr w0.35: R5.2@16.9,6.575 v2(16.9,6.564) 16.95,6.514 17.971,6.514 C32.1@18.007,6.478 ; C55.1@17.305,9.125 C55.1@17.327,9.125 ; C32.1@18.007,6.453 C32.1@18.007,6.478 ; C26.1@18.4,9.75 18.421,9.771 v2(18.429,9.771) ; C26.1@18.406,9.744 18.406,9.327 18.734,9 19.771,9 19.925,8.846 19.925,8.683 19.942,8.666 19.942,8.497 19.942,8.334 19.877,8.269 19.877,8.011 C25.1@19.862,7.995 ; C25.1@19.814,8.011 C25.1@19.86,8.011 ; v2@19.86,7.829 19.741,7.711 18.805,7.711 v2(18.746,7.651) 18.746,6.958 18.444,6.656 18.185,6.656 C32.1@18.007,6.478 ; v2@19.863,7.829 C25.1@19.863,7.994 ; 20.831,8.365 20.915,8.281 v2(21.219,8.281) ; C31.1@21.199,8.268 21.153,8.268 21.147,8.261 21.147,8.216 20.914,7.983 20.914,7.519 21.389,7.519 v6(21.396,7.525)
V_GAP9_reg: C21.1 J6.7 R5.1 U6.A1 | length 40.6
  Sig2 w0.35: 13.236,13.019 13.246,12.681 ccw(c13.596,12.691) 13.401,12.4 ; 13.236,13.02 cw(c13.586,13.029) 13.605,13.379 14.254,13.343 ccw(c14.277,13.742) 14.426,13.371 14.546,13.419 ; 13.402,12.4 cw(c13.181,12.066) 13.493,12.317 ccw(c13.803,12.57) 13.713,12.18 13.869,12.144 cw(c13.753,11.632) 13.942,12.122 14.015,12.094 14.575,11.772 cw(c14.375,11.425) 14.67,11.695 ccw(c14.927,11.933) 14.888,11.585 ; 14.889,11.585 15.18,11.554 ccw(c15.223,11.951) 15.274,11.554 cw(c15.346,11.034) 15.346,11.559 ; 15.347,11.559 cw(c15.347,11.034) 15.831,11.237 15.854,11.182 cw(c15.485,11.028) 15.88,10.965 15.846,10.757 15.846,10.359 16.307,9.898 16.307,9.607 16.392,9.523 16.392,7.751 15.992,7.352 15.992,6.162 15.551,5.721 v4(15.551,5.48)
  Sig2 w0.4: 14.481,13.369 15.757,13.325 ccw(c15.775,13.75) 15.832,13.329 16.354,13.4 18.875,13.4 19.05,13.575 19.839,13.575 20.414,14.15 22.3,14.15 23,14.85 23,15.8 ; 23,15.247 23,15.3
  Sig2 w0.5: 23,15.3 23,17.85
  Sig2 w0.7: 31.83,19.93 31.83,22.378 J6.7@33.177,23.725
  Sig2 w1.5: 23.248,18.098 23.75,18.6 30.625,18.6 31.75,19.725
  GND3 w0.35: v6(15.503,5.878) 15.503,5.885 v2(15.53,5.911) ; v6@15.533,5.908 15.875,6.25 16.395,6.25 16.82,5.825 v2(16.975,5.825)
  Pwr w0.35: v6(15.503,5.878) 15.503,5.527 v4(15.551,5.48)
  Bot Sig/Pwr w0.2: U6.A1@14.9,6.225 15.159,6.225 15.265,6.119 15.322,6.119
  Bot Sig/Pwr w0.35: 15.322,6.119 v2(15.53,5.911) ; R5.1@16.9,5.825 v2(16.975,5.825)
V_GAP_MEM: C5.1 C6.1 C7.1 C8.1 C9.1 C10.1 C11.1 C97.1 C98.1 C99.1 J6.10 R8.2 U1.G6 U1.G7 U1.H9 U1.J5 U2.A1 U2.A7 U2.A8 U2.D7 U16.5 | length 49.3
  Top Sig/Pwr w0.075: v1(18.272,10.875) U2.A8@18.275,10.875
  Top Sig/Pwr w0.2: v1(13.804,12.264) 13.804,12.196 U1.G6@13.825,12.175 ; U1.H9@14.225,13.375 14.235,13.385 14.235,13.673 14.277,13.715 v5(14.277,13.742) ; U1.J5@14.625,11.775 v1(14.625,11.782) ; U2.A8@18.275,10.853 U2.A8@18.275,10.875 ; v1(18.601,12.075) U2.D7@18.675,12.075 ; U2.A7@18.675,10.875 v1(18.677,10.871) ; U2.A1@21.075,10.875 21.275,10.675
  Top Sig/Pwr w0.3: 21.275,10.675 21.275,10.667 v5(21.541,10.401)
  GND1 w0.2: v3(13.639,12.71) v1(13.825,12.575) ; v3(13.671,12.332) 13.705,12.298 13.77,12.298 v1(13.804,12.264) ; v3(14.612,11.643) 14.625,11.656 v1(14.625,11.782) ; v3(17.975,10.776) 18.073,10.875 v1(18.272,10.875) ; v3(18.428,10.91) 18.434,10.904 18.644,10.904 v1(18.677,10.871) ; v3(18.527,11.961) 18.527,12.002 v1(18.601,12.075)
  GND3 w0.2: v6(13.6,12.775) v2(13.875,12.775) ; v2(13.742,12.126) 13.784,12.126 v6(13.937,12.279) ; v6(14.564,11.908) 14.573,11.917 v2(14.573,12.065) ; v2(17.844,10.799) 17.844,10.794 v6(17.993,10.645) ; v6(18.343,10.984) 18.424,11.065 v2(18.424,11.128) ; v6(18.881,12.21) 19.066,12.026 v2(19.066,11.7)
  GND3 w0.3: v2(18.819,13.231) 18.824,13.237 v6(18.844,13.237) ; v6(21.775,11.25) 21.775,11.05 v2(21.8,11.025)
  Sig1 w0.2: v3(13.639,12.71) v4(13.7,12.9) ; v3(13.671,12.332) 13.72,12.383 ccw(c13.574,12.521) 13.767,12.465 cw(c13.959,12.411) 13.77,12.477 v4(13.803,12.57) ; v4(14.375,11.425) 14.394,11.425 v3(14.612,11.643) ; v4(17.793,10.714) 17.812,10.733 17.931,10.733 v3(17.975,10.776) ; v4(18.207,10.827) 18.226,10.847 18.364,10.847 v3(18.428,10.91) ; v3(18.527,11.961) 18.527,11.983 18.654,12.109 v4(18.654,12.136)
  Pwr w0.2: v6(13.6,12.775) v4(13.7,12.9) ; v4(13.803,12.57) v6(13.937,12.279) ; v4(14.375,11.425) 14.394,11.444 14.394,11.738 v6(14.564,11.908) ; v4(17.793,10.714) 17.82,10.714 17.889,10.645 v6(17.993,10.645) ; v4(18.207,10.827) 18.207,10.848 v6(18.343,10.984) ; v4(18.654,12.136) 18.681,12.136 18.755,12.21 v6(18.881,12.21)
  Pwr w0.3: v6(18.844,13.237) 18.874,13.266 18.899,13.266 19.158,13.525 20.093,13.525 21.02,12.598 21.157,12.598 21.774,11.981 v6@21.774,11.243
  Bot Sig/Pwr w0.18: U16.5@20.382,11.265 20.677,10.971
  Bot Sig/Pwr w0.2: C7.1@14.137,13.416 14.182,13.416 14.248,13.481 14.248,13.686 14.277,13.715 v5(14.277,13.742) ; 18.719,11.201 18.719,11.271 18.786,11.339 18.786,11.364 18.903,11.482 19.044,11.482 19.052,11.49 C98.1@19.052,11.61 ; 20.677,10.971 21.144,10.971 21.19,11.017 C99.1@21.19,11.093
  Bot Sig/Pwr w0.3: C5.1@13.832,12.186 13.832,12.628 C6.1@13.832,12.687 ; C6.1@13.859,12.655 14.011,12.807 14.596,12.807 ; C7.1@14.137,13.416 14.137,13.266 14.596,12.807 ; C97.1@14.582,12.077 14.631,12.127 14.631,12.575 14.863,12.807 ; 15.15,14.426 15.41,14.166 ; C10.1@17.484,12.434 17.445,12.473 17.445,13.141 ; C10.1@17.648,12.475 17.648,11.563 17.866,11.345 17.866,11.181 ; C9.1@17.922,10.726 17.907,10.726 17.869,10.765 17.869,11.068 17.866,11.07 17.866,11.181 ; v2(18.424,11.128) 18.646,11.128 18.719,11.201 ; C11.1@18.448,11.07 17.977,11.07 17.866,11.181 ; v2(18.819,13.231) 18.729,13.141 17.445,13.141 ; v5(21.541,10.401) 21.431,10.401 21.256,10.576 21.256,10.939 21.225,10.971 21.225,10.979 21.256,11.01 21.86,11.01 C8.1@21.9,11.05 ; C8.1@21.774,11.243 21.774,11.176 C8.1@21.9,11.05 ; v2(21.8,11.025) 21.825,11.05 C8.1@21.9,11.05 ; 14.596,12.807 14.863,12.807 ; 14.863,12.807 15.181,13.125 15.181,13.937 15.41,14.166 ; 15.41,14.166 16.134,14.166 16.85,13.45 R8.2@16.85,13.425 16.876,13.399 17.187,13.399 17.445,13.141
  Bot Sig/Pwr w0.45: 15.136,15.055 15.075,15.117 15.075,17.35 15.25,17.525
  Bot Sig/Pwr w0.5: 15.136,15.055 15.14,15.043 ccw(c15.625,15.163) 15.15,15.006 15.15,14.426
  Bot Sig/Pwr w1.5: 15.112,17.663 15.943,18.494 16.226,18.494 17.057,19.325 18.367,19.325 18.519,19.477 19.786,19.477 28.43,19.4 29.673,19.4 29.823,19.551 30.551,20.279 30.551,21.171 J6.10@30.58,21.2
V_GAP_MEM_reg: C39.1 J6.9 R8.1 U7.A1 | length 32
  Pwr w0.25: 15.747,14.114 15.765,14.096 15.765,13.76 v5(15.775,13.75)
  Pwr w0.4: 15.1,15.334 15.13,15.19 15.142,15.165 cw(c14.78,14.995) 15.15,15.148 15.2,15.027 15.2,14.661 15.747,14.114
  Pwr w0.5: 15.014,16.863 15.014,15.786 15.05,15.75 15.05,15.375
  Pwr w0.7: 15.014,16.863 15,16.877 15,16.985 15.565,17.55 16.85,17.55 19.17,19.87 19.17,21.695 19.17,24.258 20.362,25.45 ; 29.65,25.25 30.398,24.502 30.398,23.977 J6.9@30.525,23.85 ; 30.525,24.7 30.525,24.5 J6.9@30.525,23.85 ; J6.9@30.58,23.74 30.525,23.795 J6.9@30.525,23.85 ; J6.9@30.725,23.65 J6.9@30.525,23.85
  Pwr w1.5: 20.362,25.45 29.575,25.45 30.525,24.5 30.6,24.425 J6.9@30.6,23.95
  Bot Sig/Pwr w0.2: U7.A1@16.119,11.968 16.382,11.968
  Bot Sig/Pwr w0.25: v5(15.775,13.75) 15.775,13.743 16.542,12.975 16.575,12.975 16.85,12.7 R8.1@16.85,12.675
  Bot Sig/Pwr w0.3: 16.382,11.968 16.669,11.968 16.7,11.937 16.7,11.904 16.731,11.936 16.731,12.2 16.846,12.315 16.846,12.647 R8.1@16.848,12.649
V_GAP_MIC: C90.1 J6.12 MIC1.7 R10.2 R21.2 | length 19.7
  GND3 w0.075: v2(22.914,12.389) 22.914,12.359 23.101,12.172 v6(23.101,12.141) ; v6(26.356,12.041) 26.39,12.041 26.422,12.01 26.49,12.01 v2(26.514,11.986)
  GND3 w0.3: v2@23.469,14.758 v6(23.592,14.674)
  GND3 w0.4: v2(23.45,14.778) v2@23.469,14.758 ; v2(23.658,13.229) 23.658,13.612 23.94,13.895 v6(23.94,13.919)
  Sig1 w0.7: v5(22.467,17.5) 24.078,19.111 25.951,19.111 J6.12@28.04,21.2
  Pwr w0.075: v6(23.101,12.141) 23.439,11.804 23.439,11.716 24.138,11.016 25.038,11.016 25.079,11.057 25.099,11.057 25.424,11.382 25.485,11.382 25.606,11.503 25.818,11.503 v6(26.356,12.041)
  Pwr w0.4: v6(23.592,14.674) 23.873,14.394 23.873,14.12 23.875,13.992 23.899,13.968 23.944,13.923 v6(23.94,13.919)
  Bot Sig/Pwr w0.1: R21.2@26.5,11.966 26.514,11.98 v2(26.514,11.986)
  Bot Sig/Pwr w0.3: R10.2@21.448,12.783 21.485,12.746 22.079,12.746 C90.1@22.1,12.725 ; C90.1@22.084,12.694 22.121,12.657 22.731,12.657 22.764,12.625 22.865,12.625 MIC1.7@22.976,12.514
  Bot Sig/Pwr w0.4: v5(22.467,17.5) 23.039,16.928 23.039,14.996 23.257,14.778 v2(23.45,14.778) ; MIC1.7@22.976,12.412 22.976,12.514 23.262,12.8 23.262,12.889 23.602,13.229 v2(23.658,13.229)
  other v5: 22.467,17.5 22.467,17.5
V_GAP_MIC_reg: C48.1 J6.11 R10.1 U8.A1 | length 18.8
  GND3 w0.3: v2(21.575,13.4) 21.725,13.25 v6(22.25,13.25)
  Sig1 w0.5: v4(22.349,13.599) 22.338,13.61 22.338,14.17 23.05,14.882 23.05,16.786 23.05,16.975 23.725,17.65
  Sig1 w0.7: 23.725,17.65 27.725,17.65 29.29,19.215 29.29,22.338 28.025,23.603 J6.11@28.025,23.825
  Pwr w0.3: v6(22.25,13.25) 22.338,13.588 v4(22.349,13.599)
  Bot Sig/Pwr w0.18: U8.A1@20.2,12.975 20.209,12.984 C48.1@20.78,12.984
  Bot Sig/Pwr w0.3: C48.1@20.75,13.084 20.781,13.115 20.781,13.137 21.07,13.425 21.35,13.425 R10.1@21.425,13.5 ; v2(21.575,13.4) 21.55,13.425 21.5,13.425 R10.1@21.425,13.5 ; R10.1@21.425,13.5 R10.1@21.425,13.525 R10.1@21.425,13.5
V_IMU: C58.1 C59.1 C60.1 J6.6 R3.2 U21.5 U21.8 U21.12 | length 31.7
  Top Sig/Pwr w0.2: C59.1@21.275,14.175 21.275,14.101 21.303,14.072 21.553,14.072 22.025,13.6 U21.12@22.137,13.6
  Top Sig/Pwr w0.3: U21.8@23.875,14.275 C60.1@24.721,14.275 ; U21.5@23.962,12.6 24.525,12.6 24.701,12.424 24.701,12.387 C58.1@24.819,12.269
  Top Sig/Pwr w0.4: C59.1@21.075,14.25 21.075,14.3 21.625,14.85 22.525,14.85 22.55,14.875 22.575,14.85 24.441,14.85 24.675,14.616 C60.1@24.675,14.35 ; v1(24.7,14.4) 24.721,14.379 C60.1@24.721,14.275
  Top Sig/Pwr w0.5: 22.55,14.875 23,15.325 23,16.993 23.982,17.975
  Top Sig/Pwr w0.7: 23.982,17.975 34.975,17.975 35.65,18.65 35.65,21.25 J6.6@35.675,21.275
  GND1 w0.4: v3(20.925,13.8) v1(20.975,14.15) ; v3(24.566,14.493) 24.658,14.4 v1(24.7,14.4) ; v1(24.774,12.173) 24.891,12.173 v3(24.919,12.146)
  GND3 w0.4: v2(21.175,14.2) 21.246,14.129 v6(21.246,13.725)
  Sig1 w0.4: v3(20.925,13.8) 21.125,13.7 v4(21.125,13.675) ; v3(24.566,14.493) 24.567,14.494 24.774,14.287 25.48,14.287 26.087,13.68 26.087,12.82 25.467,12.2 24.973,12.2 v3(24.919,12.146)
  Pwr w0.2: v4(21.125,13.675) 21.125,13.7 21.131,13.694 21.215,13.694 v6(21.246,13.725)
  Bot Sig/Pwr w0.4: v2(21.175,14.2) 21.225,14.2 21.375,14.35 R3.2@21.4,14.35
V_nRF: C18.1 C64.1 C69.1 C75.1 C76.1 C77.1 C78.1 C79.1 C80.1 C81.1 IC2.A2 J3.1 J6.2 R1.2 R6.2 R7.2 R24.1 R26.1 R27.1 R28.1 R29.1 U3.A4 U4.A2 U5.A3 U5.B7 U5.B10 U5.B12 U5.D2 U5.E11 U5.H11 U5.K1 U5.L5 U5.L11 | length 129
  Top Sig/Pwr w0.075: v1(10.09,7.087) 10.09,7.085 U5.B10@10.1,7.075 ; U5.B7@10.1,6.025 v1(10.197,6.123) ; v1(17.01,2.947) 17.463,2.947 17.747,2.663 17.815,2.663 17.841,2.636 18.065,2.636 18.091,2.663 20.059,2.663 20.122,2.6 v1(20.65,2.6)
  Top Sig/Pwr w0.1: 14.417,3.945 14.463,3.945 ; 14.44,3.922 14.487,3.875 14.569,3.793 14.588,3.793 14.638,3.743 v1(14.665,3.743)
  Top Sig/Pwr w0.18: 9.527,4.848 U5.A3@9.75,4.625 ; v1(10.095,8.015) 10.098,8.012 U5.B12@10.1,7.775 U5.B12@10.1,7.775 ; U5.D2@10.8,4.275 v1@10.8,4.498 ; v1(11.146,7.761) 11.152,7.754 11.152,7.427 U5.E11@11.15,7.425 ; U5.H11@12.2,7.425 12.212,7.425 v1(12.213,7.424) ; U5.K1@12.9,3.925 12.902,3.923 12.902,3.781 13.038,3.645 ; U5.L5@13.25,5.325 13.252,5.327 13.452,5.327 13.498,5.372 ; U5.L11@13.25,7.425 13.252,7.423 13.505,7.423 13.509,7.419
  Top Sig/Pwr w0.2: v1(8.855,8.646) 8.859,8.65 C69.1@8.929,8.65 C69.1@8.979,8.65 ; C69.1@9.006,8.633 9.042,8.633 9.244,8.431 9.254,8.431 9.356,8.329 9.356,7.829 v1(9.332,7.804) ; J6.2@40.8,21.2 J6.2@40.74,21.2 40.845,21.095 41.905,21.095 J3.1@46.5,16.5
  Top Sig/Pwr w0.22: C80.1@11.621,3.209 11.65,3.209 11.842,3.401 11.842,3.508 11.951,3.616 12.404,3.616 12.444,3.656
  Top Sig/Pwr w0.3: v1(7.775,7.125) C64.1@7.8,7.1 C64.1@7.85,7.1 ; 12.444,3.656 12.902,3.656 12.913,3.645 13.038,3.645 13.048,3.645 13.111,3.582 13.322,3.582 13.33,3.573 13.819,3.573 13.85,3.541 C76.1@13.881,3.573 ; 13.498,5.372 13.519,5.394 13.944,5.394 13.975,5.425 C77.1@13.975,5.471 ; 13.509,7.419 13.619,7.309 C75.1@14.023,7.309 ; C76.1@13.894,3.573 14.091,3.573 14.171,3.652 14.2,3.652 14.331,3.784 14.331,3.813 14.44,3.922 14.463,3.945 ; 14.425,3.875 14.487,3.875 14.533,3.875 v1(14.665,3.743)
  Top Sig/Pwr w0.35: C78.1@9.031,4.848 9.527,4.848 ; C75.1@13.985,7.254 14.382,7.254 ; C77.1@14.036,5.481 14.367,5.481
  Top Sig/Pwr w0.36: C79.1@13.432,8.43 13.438,8.435 C79.1@13.438,8.472 ; C79.1@13.448,8.469 13.494,8.469 14.493,7.469 14.493,7.366
  Top Sig/Pwr w0.4: 14.367,5.481 14.589,5.259 ; 14.382,7.254 14.478,7.158 ; 14.417,3.945 14.417,4.574 14.549,4.706 14.549,4.808 14.574,4.833 R1.2@14.599,4.833 14.589,4.843 14.589,5.259 ; 14.589,7.27 14.589,5.259
  GND1 w0.075: v3(9.933,6.155) 9.949,6.139 10.181,6.139 v1(10.197,6.123) ; v3(9.958,7.104) 9.966,7.095 10.081,7.095 10.086,7.091 v1(10.09,7.087) ; v1(20.65,2.6) 20.665,2.585 20.984,2.585 v3(20.999,2.57)
  GND1 w0.1: v1(14.665,3.743) 14.684,3.724 14.861,3.724 15.361,3.224 16.733,3.224 v1(17.01,2.947)
  GND1 w0.18: v3@9.956,7.094 9.959,7.091 v1@10.086,7.091 ; v1(10.095,8.015) 10.099,8.018 10.16,8.018 10.233,8.092 10.233,8.243 v3(10.237,8.247) ; v3(10.785,4.155) 10.788,4.159 10.788,4.244 10.795,4.251 10.795,4.495 v1(10.799,4.498) ; v3(10.985,7.975) 10.985,7.969 11.142,7.813 11.142,7.764 v1(11.146,7.761) ; v1(12.213,7.424) 12.213,7.429 12.421,7.637 12.421,7.646 v3(12.425,7.65)
  GND1 w0.2: v1(8.855,8.646) 8.976,8.525 v3(9.025,8.525) ; v3(9.186,7.596) 9.332,7.742 v1(9.332,7.804) ; v1(13.425,8.425) v3(13.425,8.575)
  GND1 w0.3: v1(7.775,7.125) 7.875,7.025 v3(7.875,7) ; v3(8.868,4.634) 9.048,4.814 v1(9.048,4.862) ; v3(11.503,3.439) 11.638,3.304 v1(11.638,3.189)
  GND3 w0.075: v2(19.92,2.305) 19.928,2.305 20.216,2.017 20.216,1.834 v2@20.4,1.65 ; v2(20.375,1.575) 20.591,1.791 20.591,2.165 21.012,2.586 21.012,2.636 21.094,2.718 21.446,2.718 v6(21.459,2.731)
  GND3 w0.2: v6(8.9,8.825) 9.025,8.7 v2(9.025,8.675) ; v2(10.875,7.775) 10.975,7.875 v6(10.975,8) ; v6(13.49,8.457) 13.5,8.467 v2(13.5,8.6)
  GND3 w0.22: v2(10.777,2.765) 11.052,2.489 v6(11.052,2.448)
  Sig1 w0.075: v4(9.697,6.198) 9.718,6.177 9.912,6.177 v3(9.933,6.155) ; v3(20.999,2.57) 21.012,2.583 21.163,2.583 21.182,2.564 21.358,2.564 21.393,2.599 21.957,2.599 v4(22.392,2.164)
  Sig1 w0.18: v4(10.167,8.389) 10.19,8.366 10.19,8.299 10.237,8.252 v3(10.237,8.247) ; v3(10.985,7.975) 10.989,7.978 10.989,8.066 11.047,8.124 v4(11.047,8.157) ; v3(12.425,7.65) 12.425,7.655 12.606,7.836 v4(12.606,7.851)
  Sig1 w0.2: v3(9.025,8.525) v4(9.025,8.725) ; v3(9.186,7.596) 9.186,7.302 9.388,7.101 9.399,7.101 9.454,7.046 9.9,7.046 v3(9.958,7.104) ; v4(13.351,8.425) 13.351,8.452 13.425,8.526 v3(13.425,8.575)
  Sig1 w0.22: v4(11.181,2.505) 11.181,2.526 11.11,2.598 11.11,2.999 11.503,3.393 v3(11.503,3.439)
  Sig1 w0.3: v4(7.725,7.175) 7.725,7.15 v3(7.875,7) ; v4(8.764,4.715) 8.845,4.634 v3(8.868,4.634) ; v3(10.785,4.155) 10.787,4.155 v3(11.503,3.439)
  Pwr w0.075: v6(21.459,2.731) 21.673,2.731 22.205,2.198 22.358,2.198 v4(22.392,2.164)
  Pwr w0.2: v6(8.9,8.825) 9,8.725 v4(9.025,8.725) ; v6(10.975,8) 10.975,8.057 11.075,8.157 v4@11.075,8.175 ; v4(13.351,8.425) 13.37,8.444 13.477,8.444 v6(13.49,8.457)
  Pwr w0.22: v6(11.052,2.448) 11.103,2.448 11.16,2.505 v4(11.181,2.505)
  Pwr w0.3: 7.387,7.486 7.698,7.175 v4(7.725,7.175) ; 8.608,4.805 8.691,4.805 9.697,5.81 v4(9.697,6.198) ; v4(10.167,8.389) 10.127,8.429 10.127,8.622 10.27,8.765 10.27,8.911 10.27,8.988 ; 10.931,8.786 10.931,8.273 v4(11.047,8.157)
  Pwr w0.5: 7.7,9.025 7.666,9.059 7.262,9.463 7.262,10.355 7.144,10.473 7.144,10.531 6.489,11.186 6.489,13.392 6.65,13.553 6.65,13.7 7.463,14.513 7.733,14.585 7.866,14.595 8.195,14.595 8.2,14.6 8.475,14.6 8.757,14.882 8.757,17.768 ; v4@8.933,8.69 9.724,8.69 9.945,8.911 10.27,8.911 10.806,8.911 10.931,8.786 ; v4(12.606,7.851) 12.99,7.851 13.49,8.351 v6(13.49,8.457)
  Pwr w0.6: v4(8.764,4.715) 8.695,4.784 8.564,4.784 7.387,5.961 7.387,7.486 7.387,8.781 7.666,9.059 7.763,9.157 8.411,9.157 8.519,9.049 8.532,9.049 8.577,9.004 8.579,9.004 8.877,8.706 v4@8.938,8.706 ; 10.931,8.786 11.719,8.786 12.595,7.911 12.595,7.862 v4(12.606,7.851)
  Pwr w1.5: 8.757,17.768 10.55,19.56 10.55,25.45 12.2,27.1 42.5,27.1 43.9,25.7 43.9,22.323 42.749,21.171 J6.2@40.809,21.171
  Bot Sig/Pwr w0.075: 13.456,8.443 13.456,8.406 13.456,7.227 13.634,7.05 R28.1@13.679,7.05 ; R29.1@13.679,5.525 R28.1@13.679,7.05 ; U3.A4@19.55,2.475 19.589,2.475 19.589,2.452 19.716,2.326 19.9,2.326 v2(19.92,2.305) ; R6.2@20.35,1.575 20.375,1.55 R7.2@20.375,1.008 ; v2(20.375,1.575) 20.35,1.6 R6.2@20.35,1.625 20.488,1.763 20.663,1.763 20.716,1.815 20.75,1.815
  Bot Sig/Pwr w0.18: C81.1@13.718,8.198 13.718,8.218 13.841,8.341 14.416,8.341 IC2.A2@14.425,8.35
  Bot Sig/Pwr w0.2: v2(10.875,7.775) 10.875,7.633 10.956,7.551 10.959,7.551 10.959,7.969 U4.A2@11.083,8.093 ; C18.1@10.943,7.557 C18.1@10.966,7.534 ; 11.036,7.78 11.036,8.045 11.083,8.092 U4.A2@11.083,8.093 ; U4.A2@11.083,8.099 U4.A2@11.083,8.093 ; 13.456,8.443 13.456,8.556 v2(13.5,8.6)
  Bot Sig/Pwr w0.22: v2(10.777,2.765) 10.777,2.736 R24.1@10.8,2.712
  Bot Sig/Pwr w0.3: C18.1@11.007,7.566 11.02,7.566 11.036,7.583 11.036,7.78 ; 13.432,8.43 13.456,8.406 13.677,8.185 C81.1@13.715,8.185
V_nRF_RAM: C19.1 C82.1 C83.1 R31.2 U4.A1 U17.A4 | length 8.7
  Top Sig/Pwr w0.075: v1(13.872,8.611) 14.406,8.611 14.5,8.705 R31.2@14.5,8.725
  GND1 w0.075: v1(13.312,8.881) 13.315,8.884 13.599,8.884 v1(13.872,8.611)
  GND1 w0.3: v3(12.859,9.058) 12.926,9.125 v1(12.975,9.125)
  GND3 w0.18: 14.08,10.731 14.174,10.637 14.174,10.448 v2(14.178,10.444)
  GND3 w0.3: v2(11.025,9) 11.15,8.875 11.675,8.875 12.026,8.524 12.432,8.524 v2@12.875,8.968 ; v2(12.875,8.9) v2@12.875,8.968 ; v6(12.875,9.05) v2@12.875,8.968 ; v2(13.178,10.803) 13.178,10.807 13.325,10.954 13.857,10.954 14.08,10.731
  Sig1 w0.3: v3(12.859,9.058) 12.9,9.016 12.9,8.975 v4(12.959,8.916)
  Pwr w0.3: v6(12.875,9.05) 12.875,9 v4(12.959,8.916)
  Bot Sig/Pwr w0.18: U4.A1@11.084,8.5 11.084,8.783 ; U17.A4@14.175,10.475 14.175,10.447 v2(14.178,10.444)
  Bot Sig/Pwr w0.25: C82.1@13.12,10.299 13.12,10.528 13.16,10.569 13.16,10.785 v2(13.178,10.803)
  Bot Sig/Pwr w0.3: v2(11.025,9) v2(11.025,9) 10.979,9.045 11.025,9.045 C19.1@11.028,9.042 ; C19.1@11.056,9.07 C19.1@11.028,9.042 ; 11.084,8.783 11.084,8.837 11.056,8.866 11.056,9.013 C19.1@11.028,9.042 ; v2@12.892,8.881 12.65,9.123 12.65,10.024 12.792,10.166 13.041,10.166 C82.1@13.075,10.2 ; C82.1@13.063,10.197 C82.1@13.063,10.243
VA0: C13.1 J2.41 U3.B5 | length 23.6
  Sig2 w0.4: v4@7.8,4.8 7.497,4.497 7.497,3.488 7.746,3.239 8.051,3.239 8.14,3.15 8.225,3.15 8.484,2.891 8.484,1.934 8.917,1.501 9.395,1.501 9.476,1.582 10.318,1.582 10.725,1.175 10.725,0.697 v4(10.728,0.693)
  GND3 w0.2: v2(19.15,2.875) 19.15,3.003 v6(19.159,3.012) ; v6@21.289,3.099 21.3,3.11 v6(21.3,3.175)
  GND3 w0.3: v6(7.427,5.178) 7.523,5.274 v2(7.545,5.274)
  Sig1 w0.5: v4@19.1,2.85 19.513,2.85 20.365,3.702 20.8,3.702 20.982,3.52 21.3,3.202 21.3,3.2
  Pwr w0.2: 13.715,0.305 14.539,0.305 14.559,0.325 ; v4(19.095,2.83) 19.114,2.849 19.114,2.967 v6(19.159,3.012) ; v4(21.15,3.2) 21.169,3.181 21.294,3.181 v6(21.3,3.175)
  Pwr w0.25: 14.559,0.325 14.69,0.325 14.715,0.35 14.75,0.35
  Pwr w0.26: 16.292,0.35 16.32,0.35 16.34,0.33 19.429,0.33 19.549,0.45
  Pwr w0.3: v6(7.427,5.178) v4(7.803,4.803) ; 14.75,0.35 16.292,0.35
  Pwr w0.4: v4(10.728,0.693) 10.887,0.852 13.387,0.852 13.411,0.829 ; 13.414,0.829 13.637,0.606 13.637,0.594 ; 20.631,2.533 20.672,2.575 20.797,2.575 21.124,2.902 21.124,3.041 21.258,3.175 v6(21.3,3.175)
  Pwr w0.5: 13.411,0.829 13.414,0.829 ; 13.733,0.45 13.733,0.467 ; 19.549,0.45 19.669,0.45 20.644,1.425 20.644,2.52
  Bot Sig/Pwr w0.18: J2.41@7.345,5.25 7.52,5.25 v2(7.545,5.274)
  Bot Sig/Pwr w0.2: v2(21.29,3) C13.1@21.3,3.012
VA1: C14.1 J2.11 U3.A5 | length 23.7
  GND3 w0.2: v2(20.475,2.95) 20.5,2.95 v6(20.6,3.05)
  GND3 w0.4: v2(9.425,1.175) 9.625,1.375 v6(10.178,1.375)
  Sig1 w0.22: 13.487,0.711 13.779,0.419 13.882,0.315 14.579,0.315 14.593,0.33 ; 14.702,0.31 15.12,0.31
  Sig1 w0.25: 18.686,0.455 18.799,0.343 19.122,0.343 ; 18.799,0.325 19.14,0.325 ; 19.688,0.45 19.511,0.45 19.404,0.343 19.122,0.343 ; 19.719,0.325 19.14,0.325 ; 19.122,0.343 19.14,0.325
  Sig1 w0.26: 14.593,0.33 14.702,0.33 14.722,0.35 14.75,0.35
  Sig1 w0.3: v4@13.473,1.39 13.487,1.376 13.487,0.792 ; 14.75,0.35 14.89,0.35 14.99,0.45
  Sig1 w0.4: 13.487,0.792 13.879,0.4 ; 20.572,2.817 20.582,2.827 v4(20.582,3.177)
  Sig1 w0.5: 14.99,0.45 16.836,0.45 16.84,0.455 18.686,0.455 ; 19.688,0.45 19.792,0.554 19.792,0.593 20.572,1.373 20.572,2.817
  Pwr w0.3: v6@10.2,1.425 10.223,1.425 10.325,1.527 10.8,1.527 10.9,1.427
  Pwr w0.4: v4(20.582,3.177) 20.582,3.165 20.649,3.099 v6(20.6,3.05)
  Pwr w0.5: 10.9,1.427 10.924,1.404 v4(13.475,1.404)
  Bot Sig/Pwr w0.2: 9.408,5.614 9.444,5.65 J2.11@10.055,5.65 ; U3.A5@19.55,2.875 19.554,2.879 19.784,2.879 19.883,2.978
  Bot Sig/Pwr w0.3: 8.725,3.484 8.725,4.011 8.775,4.061 8.775,4.616 8.829,4.671 8.829,5.124 8.884,5.179 ; 19.883,2.978 20.331,2.978 20.334,2.975 20.498,2.975 C14.1@20.498,2.937 ; C14.1@20.5,2.937 C14.1@20.525,2.912
  Bot Sig/Pwr w0.4: 8.725,3.484 8.729,3.479 8.729,1.559 8.964,1.325 9.275,1.325 v2(9.425,1.175) ; 8.884,5.179 9.031,5.326 9.12,5.326 9.408,5.614
VBAT: C2.1 J2.1 J2.2 J6.15 J6.16 J8.1 U3.E3 | length 89.6
  Top Sig/Pwr w0.5: J8.1@22.705,5.575 22.955,5.575 22.955,4.845 23.306,4.494 23.306,4.445 v5(23.309,4.441)
  Sig2 w0.3: v4(9.219,1.926) 9.4,2.107 9.4,2.157 ; v4(16.575,1.321) 16.708,1.188 16.708,1.102
  Sig2 w0.35: 22.575,2.725 22.983,2.725 v4(23.133,2.576) ; v4(24.067,1.08) 24.067,1.622 24.34,1.894 24.394,1.894
  Sig2 w0.5: 15.28,2.334 15.28,1.151 15.573,0.858 16.705,0.858 16.705,1.098 ; 16.808,0.841 18.41,0.841 18.91,1.341 18.91,1.99 19.278,2.358 19.295,2.358 19.593,2.655 20.98,2.655 21.05,2.725 21.347,2.725 21.436,2.814 21.9,2.814 21.934,2.78 22.52,2.78 22.558,2.742 22.575,2.725 22.6,2.7 ; 24.394,1.894 26.238,1.894 26.55,2.206 26.55,3.88 27.07,4.4 29.293,4.4 29.95,5.057 v5(29.95,5.464)
  Sig2 w0.6: 9.4,2.157 9.418,2.175 10.55,2.175 10.905,1.82 11.18,1.82 11.325,1.675 12.757,1.675 13.922,2.84 14.774,2.84 15.28,2.334 ; 22.541,2.725 22.558,2.742 23.39,3.574 23.39,4.361 v5(23.309,4.441)
  GND3 w0.2: v6(8.908,2.04) 9.235,2.04 v2(9.25,2.025) 9.25,1.9 v6(9.125,1.775) 9.125,1.825 v6@8.975,1.975 ; v6@8.95,2.1 9.175,2.1 v2@9.208,2.067 ; v2@9.225,1.725 v6@9.225,1.775
  GND3 w0.4: v6(16.654,1.476) 16.803,1.625 v2(16.95,1.625)
  Sig1 w0.35: v4(23.133,2.576) 23.133,2.015 v4(24.067,1.08)
  Sig1 w1.5: J6.15@22.9,23.8 22.931,23.769 22.931,21.229 J6.16@22.96,21.2 ; J6.15@22.925,23.975 22.975,24.025 22.975,24.511 23.854,25.39 41.907,25.39 42.39,24.907 42.39,20.517 40.674,18.801 36.174,18.801 34.023,16.65 32.1,16.65 31.125,15.675 31.125,6.639 v5(29.95,5.464)
  Pwr w0.2: v6(8.908,2.04) 9.081,1.868 9.133,1.868 9.192,1.926 v4(9.219,1.926) ; v6(9.125,1.775) v6@9.149,1.799
  Pwr w0.4: v4(16.575,1.321) 16.575,1.397 v6(16.654,1.476)
  Bot Sig/Pwr w0.2: v2@9.186,1.789 9.25,1.852 v2(9.25,2.025) 9.275,2.05 J2.2@10.055,2.05 ; v2(9.229,1.721) 9.409,1.721 9.48,1.65 J2.1@10.055,1.65 ; 17.637,1.899 17.768,1.899 17.945,2.075 U3.E3@17.95,2.075
  Bot Sig/Pwr w0.3: v2(16.95,1.625) C2.1@16.988,1.625 16.99,1.627 17.365,1.627 17.426,1.689
  Bot Sig/Pwr w0.4: 17.426,1.689 17.637,1.899
VD0: C41.1 J2.42 U3.B6 U3.C6 | length 16.8
  GND3 w0.3: v2(19.375,4.175) 19.5,4.05 v6(19.5,4)
  GND3 w0.4: v2(7.666,4.823) 7.763,4.823 7.902,4.683 7.99,4.683 v6(7.99,3.689)
  Sig1 w0.4: 11.007,1.991 11.186,1.812 12.187,1.812 13.724,3.349 13.738,3.349 ; 15.287,3.074 17.382,3.074
  Sig1 w0.45: v4(7.922,3.664) 7.933,3.675 8.908,3.675 9.457,3.125 9.874,3.125 11.007,1.991 ; 13.738,3.349 13.764,3.375 14.986,3.375 15.287,3.074 ; 17.382,3.074 17.489,3.074 17.79,3.375 18.441,3.375 18.994,3.929 19.346,3.929 v4(19.35,3.925)
  Pwr w0.075: v4(19.35,3.925) 19.411,3.925 19.486,4 v6(19.5,4)
  Pwr w0.4: v4(7.922,3.664) 7.965,3.664 v6(7.99,3.689)
  Bot Sig/Pwr w0.2: J2.42@7.345,4.85 7.355,4.84 7.649,4.84 v2(7.666,4.823) ; U3.C6@18.75,3.275 U3.B6@19.15,3.275 19.15,3.958 19.267,4.075 C41.1@19.275,4.075